# Altium PCB temperature_logger_pcb.PcbDoc
Units mm, origin at the board's own origin, x right, y up, seen from the top; angles counter-clockwise.
Board outline 31 x 41 mm, 2 copper layers (Top Layer, Bottom Layer); 41 components, 32 nets, 188 pads, 45 vias.
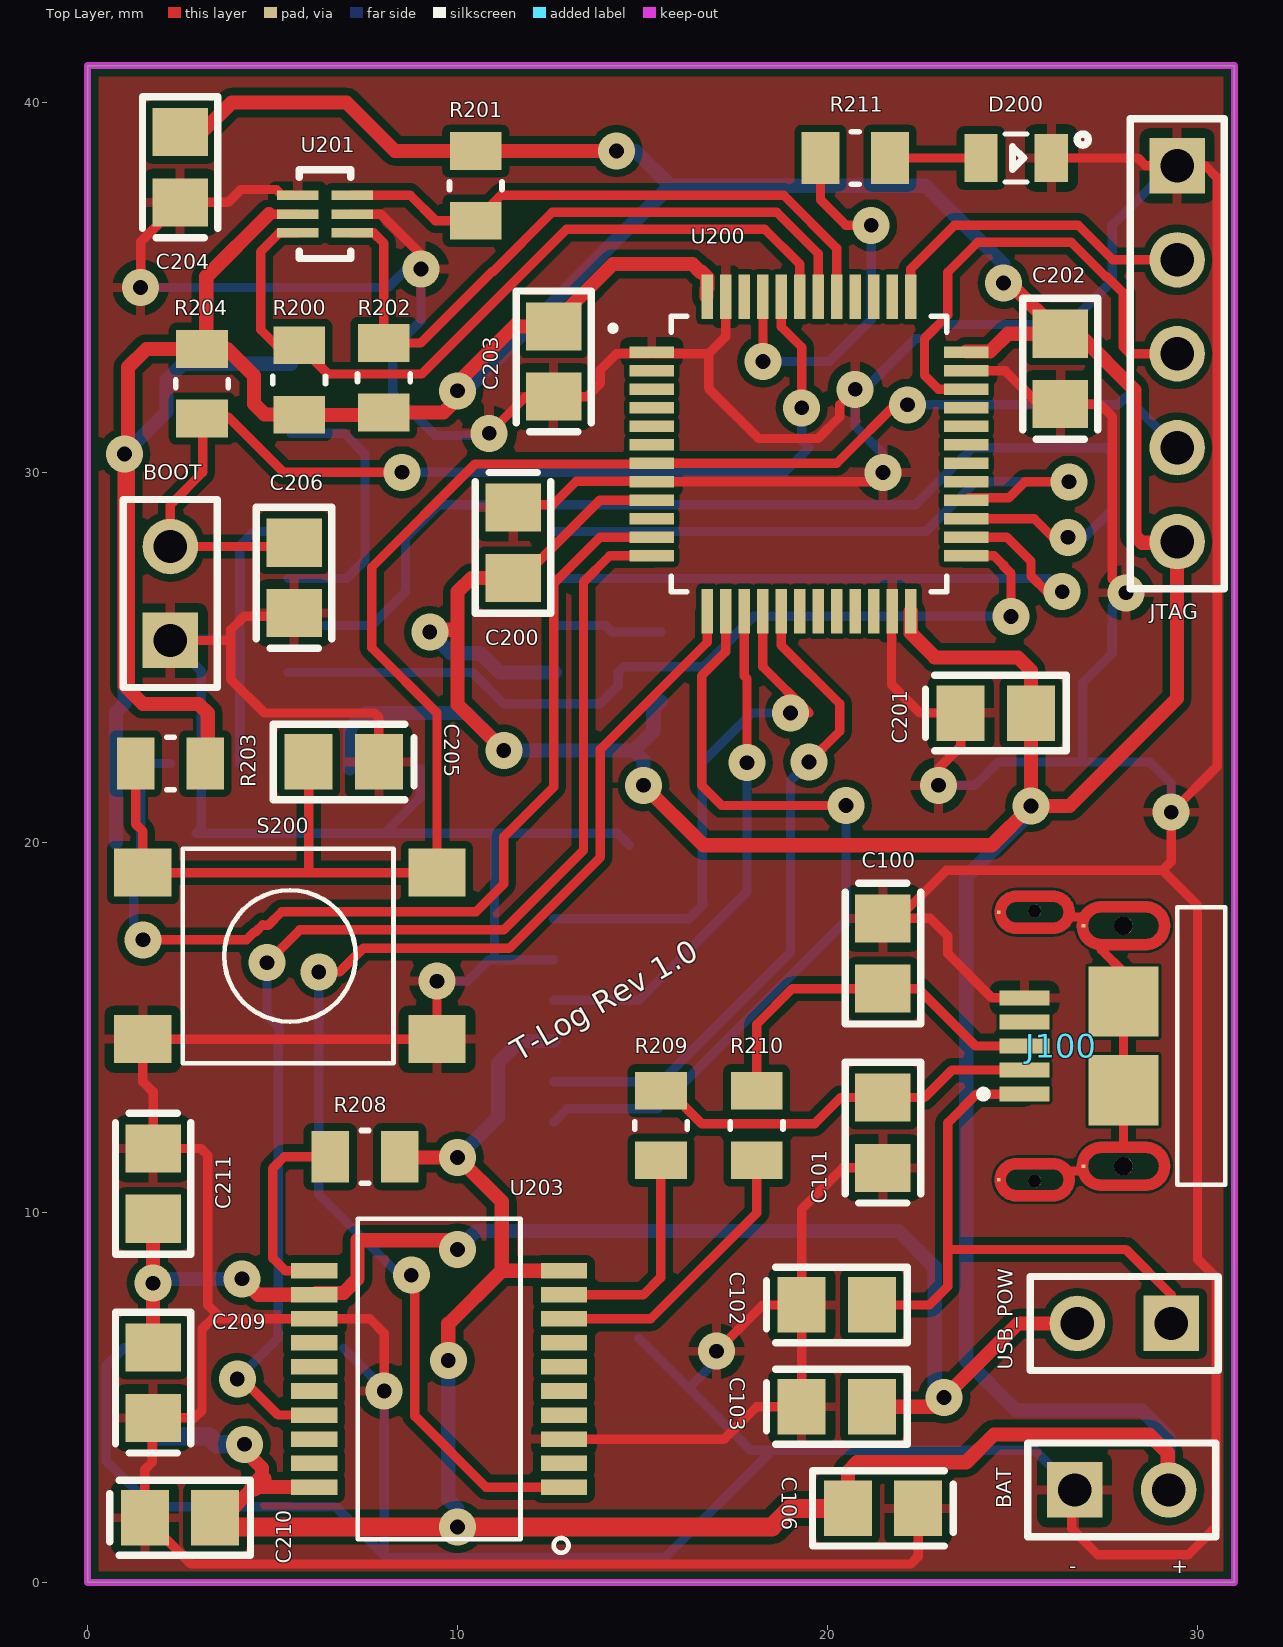
[diagram p0: Top Layer view]
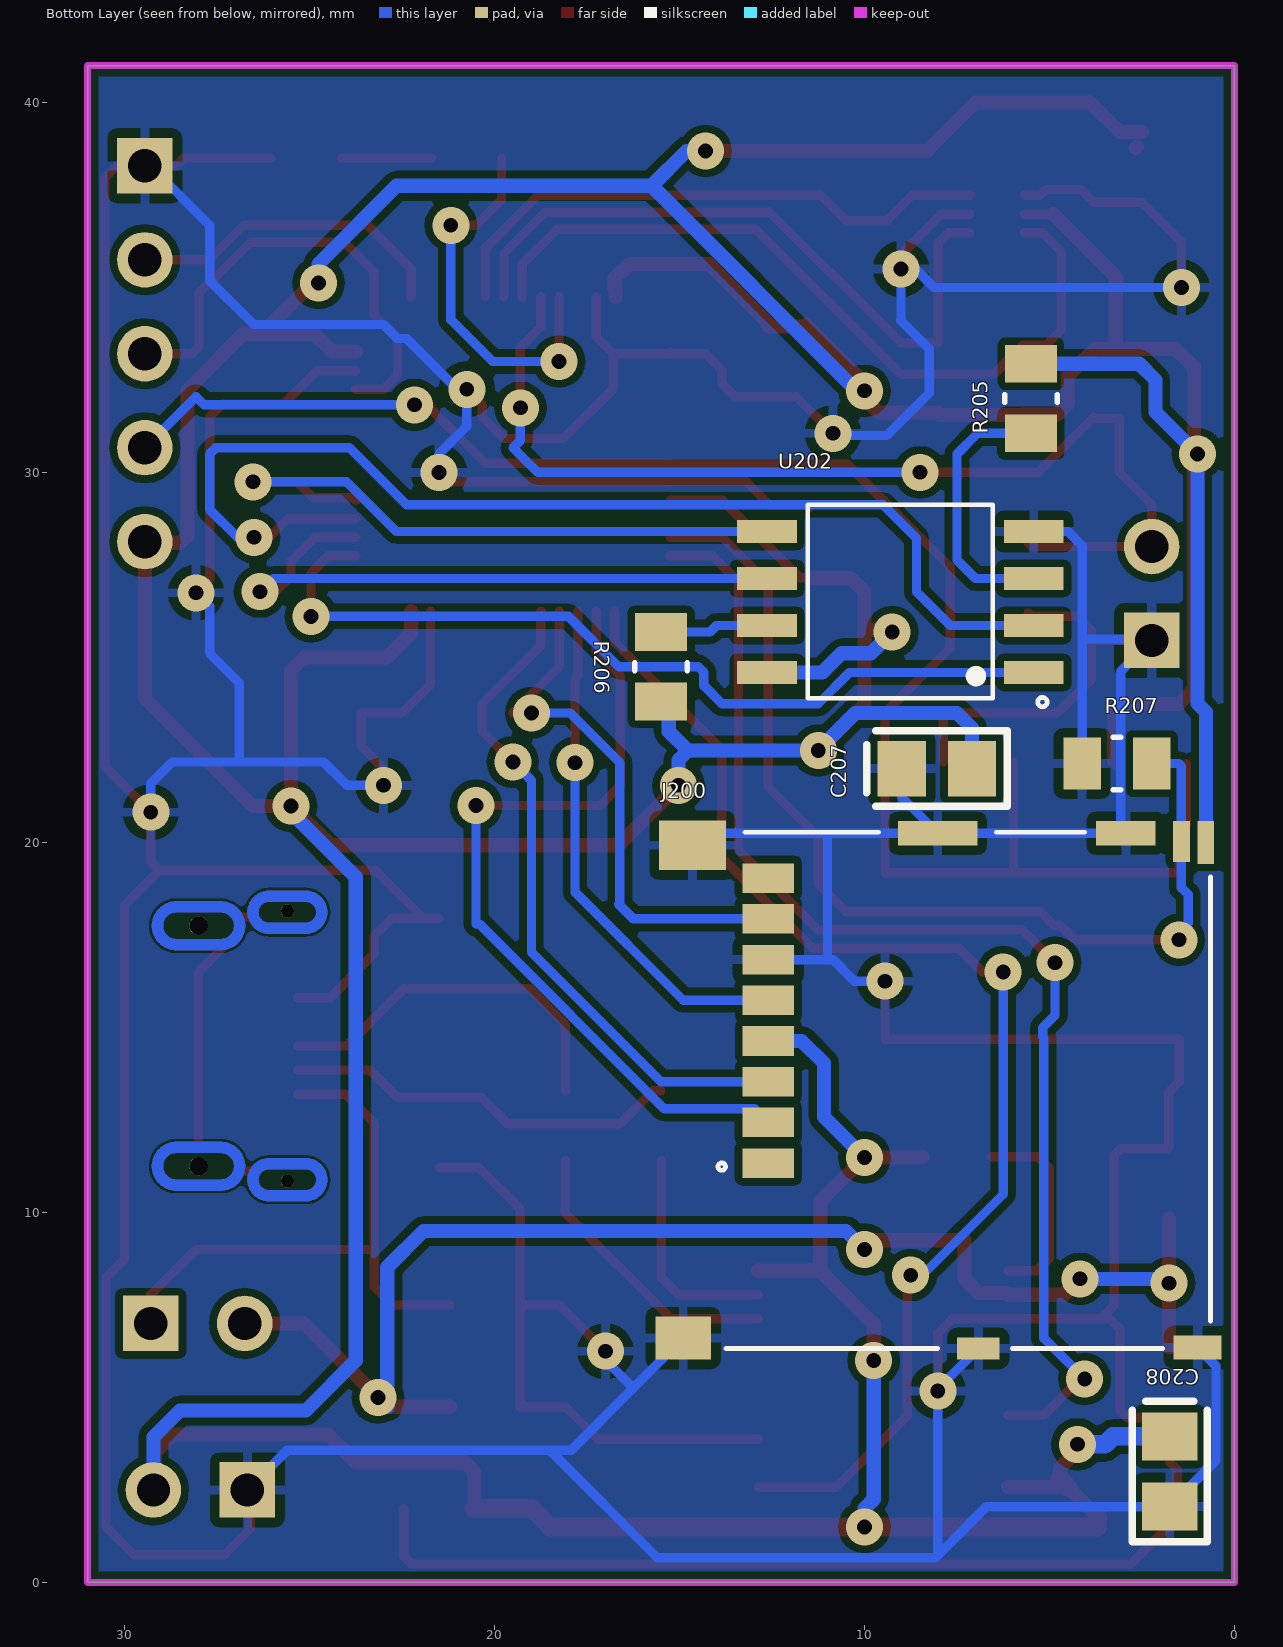
[diagram p1: Bottom Layer view, seen from below]

## Layer stack, top to bottom
Top Solder: solder mask 0.0102, Solder Resist, Dk 3.5
Top Layer: signal copper 0.0356
Dielectric 1: dielectric 0.32, FR-4, Dk 4.8
Bottom Layer: signal copper 0.0356
Bottom Solder: solder mask 0.0102, Solder Resist, Dk 3.5

## Board outline
0,0 0,41 31,41 31,0

## Design rules (kind name [scope] priority, off if disabled: settings)
Clearance STM32F4 [InComponent('U200')] p1: gap=0.152 ignorepadtopadclearanceinfootprint=FALSE
Clearance USB_PORT [InComponent('J100')] p2: gap=0.07 ignorepadtopadclearanceinfootprint=FALSE
Clearance [All] p3: gap=0.203 ignorepadtopadclearanceinfootprint=FALSE
ComponentClearance [All] p1: gap=0.254 collisioncheckmode=3 verticalgap=0.254 showdistances=TRUE
MinimumSolderMaskSliver [All] p1: minsoldermaskwidth=0.152
MinimumSolderMaskSliver MinimumSolderMaskSliver_STM [HasFootprint('LQFP48-7x7mm')] p2: minsoldermaskwidth=0.03
MinimumSolderMaskSliver MinimumSolderMaskSliver_MicroSD [HasFootprint('MicroSD')] p3: minsoldermaskwidth=0
PolygonConnect [All] p1: connectstyle=Relief reliefconductorwidth=0.254 reliefentries=4 polygonreliefangle="90 Angle" airgapwidth=0.254
RoutingVias [All] p1: holewidth=0.4 width=1 viastyle="Through Hole" minholewidth=0.3 minwidth=1 maxholewidth=0.711 maxwidth=1
SilkToSolderMaskClearance [IsPad] p1: minsilkscreentomaskgap=0.1 clearancetoexposedcopper=TRUE
SolderMaskExpansion SolderMaskExpansion_FTDI [HasFootprint('SSOP20')] p1: expansion=0
SolderMaskExpansion SolderMaskExpansion_TMP [HasFootprint('SOT563')] p2: expansion=0
SolderMaskExpansion SolderMaskExpansion_USB [HasFootprint('MicroUSB')] p3: expansion=0
SolderMaskExpansion SolderMaskExpansion_MicroSD [HasFootprint('MicroSD')] p4: expansion=0.01
SolderMaskExpansion [All] p5: expansion=0.1
Width "Schematic Width Constraint_1" [InNet('5V')] p1: maxlimit=0.508 minlimit=0.381 preferedwidth=0.381 minimp=50.000000 maximp=50.000000 favimp=50.000000
Width "Schematic Width Constraint" [InNet('3V')] p2: maxlimit=0.508 minlimit=0.254 preferedwidth=0.381 bottomlayer_minwidth=0.381 minimp=50.000000 maximp=50.000000 favimp=50.000000
Width [All] p3: maxlimit=0.381 minlimit=0.152 preferedwidth=0.254
27 further rules are at their usual default settings.

## Classes and differential pairs
component class 01_Power: BAT C100 C101 C102 C103 C106 J100 USB_POW
component class 02_MCU: BOOT C200 C201 C202 C203 C204 C205 C206 C207 C208 C209 C210 C211 D200 J200 JTAG R200 R201 R202 R203 R204 R205 R206 R207 R208 R209 R210 R211 S200 U200 U201 U202 U203

## Components (designator, comment, footprint, x,y, rotation, side; value= is the part's Value field where it differs from the comment)
BAT "" HDR1X2 26.68,2.5 r0 top
BOOT "" HDR1X2 2.239,25.46 r90 top
C100 "47 pF" C0805 21.5,17 r270 top
C101 "47 pF" C0805 21.5,12.157 r90 top
C102 "10 nF" C0805 20.252,7.5 r0 top
C103 "100 nF" C0805 20.252,4.75 r0 top
C106 "10 nF" C0805 21.5,2 r180 top
C200 "1000 pF" C0805 11.5,28.102 r270 top
C201 "1000 pF" C0805 24.548,23.5 r0 top
C202 "1000 pF" C0805 26.294,32.8 r90 top
C203 "1000 pF" C0805 12.599,33 r90 top
C204 "1000 pF" C0805 2.5,38.25 r90 top
C205 "1000 pF" C0805 6.924,22.176 r180 top
C206 "1000 pF" C0805 5.581,27.152 r90 top
C207 "1000 pF" C0805 8.044,22 r180 bottom
C208 "1000 pF" C0805 1.75,3 r270 bottom
C209 "100 nF" C0805 2.5,1.75 r0 top
C210 "1000 pF" C0805 1.771,5.4 r90 top
C211 "47 pF" C0805 1.771,10.779 r270 top
D200 "LGR971" D0805 25.1,38.5 r0 top value="Green LED"
J100 "USB_Micro_B" MicroUSB 28,14.5 r90 top value="USB Micro B"
J200 "MicroSD" MicroSD 7.849,13.3 r270 bottom
JTAG "" HDR1X5 29.45,38.29 r270 top
R200 "5 k" R0805 5.719,32.5 r90 top value=5k
R201 "5 k" R0805 10.493,37.75 r270 top value=5k
R202 "5 k" R0805 8.008,32.561 r90 top value=5k
R203 "1 k" R0805 2.239,22.135 r180 top value=1k
R204 "1 k" R0805 3.094,32.4 r270 top value=1k
R205 "1 k" R0805 5.5,32 r270 bottom value=1k
R206 "1 k" R0805 15.5,24.75 r90 bottom value=1k
R207 "10 k" R0805 3.178,22.135 r0 bottom value=10k
R208 "1 k" R0805 7.5,11.505 r180 top value=1k
R209 "27" R0805 15.5,12.348 r90 top
R210 "27" R0805 18.086,12.348 r90 top
R211 "1 k" R0805 20.75,38.5 r180 top value=1k
S200 "Switch_tactile" Tactile1 5.472,16.935 r180 top value=Switch_Tactile
U200 "STM32L053" LQFP48-7x7mm 19.5,30.5 r0 top value=STM32L053C8T6
U201 "TMP112" SOT563 6.419,36.984 r180 top value=TMP112AIDRLT
U202 "16MB_FLASH" 8-SOIC 9.03,26.5 r0 bottom value=MX25R1635FM2IH1
U203 "FT231XS-R" SSOP20 9.5,5.5 r90 top value=FT231
USB_POW "" HDR1X2 29.291,7 r180 top

## Footprints (in the part's own frame and the unit in brackets; to place one, negate y for a bottom-side part, rotate by r counter-clockwise, add the part's x,y. Pads: shape width x height; smd on the part's side, far side on the other; paste and mask are expansions set on the pad)
8-SOIC [mm]
  rect 1.61x0.61 smd: 1(-3.605,1.905) 2(-3.605,0.635) 3(-3.605,-0.635) 4(-3.605,-1.905) 5(3.605,-1.905) 6(3.605,-0.635) 7(3.605,0.635) 8(3.605,1.905)
  silkscreen extent -3.97,-2.63 2.5,2.83
C0805 [mm] "Chip Capacitor; Body 2.0 x 1.2 mm (LxW typ)"
  rect 1.3x1.5 smd: 1(-0.95,0) 2(0.95,0)
  silkscreen extent -1.9,-1.02 1.91,1.02
D0805 [mm]
  rect 0.9x1.3 smd: A(-0.95,0) C(0.95,0)
  silkscreen extent -0.3,-0.65 1.95,0.65
HDR1X2 [mm] "Connector; Header; 2 Position"
  rect 1.5x1.5 hole 0.9: 1(0,0)
  round 1.5 hole 0.9: 2(2.54,0)
  silkscreen extent -1.27,-1.27 3.81,1.27
HDR1X5 [mm] "Connector; Header; 5 Position"
  rect 1.5x1.5 hole 0.9: 1(0,0)
  round 1.5 hole 0.9: 2(2.54,0) 3(5.08,0) 4(7.62,0) 5(10.16,0)
  silkscreen extent -1.27,-1.27 11.43,1.27
LQFP48-7x7mm [mm]
  rect 1.194x0.305 smd: 1(-4.25,2.75) 2(-4.25,2.25) 3(-4.25,1.75) 4(-4.25,1.25) 5(-4.25,0.75) 6(-4.25,0.25) 7(-4.25,-0.25) 8(-4.25,-0.75) 9(-4.25,-1.25) 10(-4.25,-1.75) 11(-4.25,-2.25) 12(-4.25,-2.75) 25(4.25,-2.75) 26(4.25,-2.25) 27(4.25,-1.75) 28(4.25,-1.25) 29(4.25,-0.75) 30(4.25,-0.25) 31(4.25,0.25) 32(4.25,0.75) 33(4.25,1.25) 34(4.25,1.75) 35(4.25,2.25) 36(4.25,2.75)
  rect 0.305x1.194 smd: 13(-2.75,-4.25) 14(-2.25,-4.25) 15(-1.75,-4.25) 16(-1.25,-4.25) 17(-0.75,-4.25) 18(-0.25,-4.25) 19(0.25,-4.25) 20(0.75,-4.25) 21(1.25,-4.25) 22(1.75,-4.25) 23(2.25,-4.25) 24(2.75,-4.25) 37(2.75,4.25) 38(2.25,4.25) 39(1.75,4.25) 40(1.25,4.25) 41(0.75,4.25) 42(0.25,4.25) 43(-0.25,4.25) 44(-0.75,4.25) 45(-1.25,4.25) 46(-1.75,4.25) 47(-2.25,4.25) 48(-2.75,4.25)
  silkscreen extent -5.38,-3.72 3.72,3.72
MicroSD [mm]
  rect 0.8x1.4 smd: 1(1.965,-4.75) 2(0.865,-4.75) 3(-0.235,-4.75) 4(-1.335,-4.75) 5(-2.435,-4.75) 6(-3.535,-4.75) 7(-4.635,-4.75) 8(-5.735,-4.75)
  rect 1.15x0.45 smd: 9(-6.7,7.075)
  rect 1.1x0.45 smd: 10(-6.725,6.415)
  rect 1.35x1.8 smd: 11(-6.625,-6.8)
  rect 0.65x2.14 smd: 12(-6.95,-0.17)
  rect 0.65x1.6 smd: 13(-6.95,4.91)
  rect 0.65x1.3 smd: 14(6.95,6.85)
  rect 0.6x1.15 smd: 15(6.975,0.925)
  rect 1.16x1.5 smd: 16(6.695,-7.05)
  silkscreen extent -6.98,-6.11 6.98,7.2
MicroUSB [mm]
  rect 0.4x1.35 smd: 1(-1.3,2.675) 2(-0.65,2.675) 3(0,2.675) 4(0.65,2.675) 5(1.3,2.675)
  round 0.35 hole 0.35 unplated paste+0 mask+0: None(-3.65,2.4) None(3.65,2.4)
  round 0.5 hole 0.5 unplated paste+0 mask+0: None(-3.25,0) None(3.25,0)
  rect 0.1x0.1 smd: S1(-3.25,1.08) S2(3.25,1.08) S3(-3.615,3.369) S6(3.615,3.369)
  rect 1.9x1.9 smd: S4(-1.2,0) S5(1.2,0)
  Top Layer region: 258 vertices and 0 holes, not listed, extent 3.035,1.32 4.195,3.48
  Top Layer region: 258 vertices and 0 holes, not listed, extent -4.195,1.32 -3.035,3.48
  Top Layer region: 258 vertices and 0 holes, not listed, extent 2.59,-1.26 3.91,1.26
  Top Layer region: 258 vertices and 0 holes, not listed, extent -3.91,-1.26 -2.59,1.26
  Bottom Layer region: 258 vertices and 0 holes, not listed, extent 3.035,1.32 4.195,3.48
  Bottom Layer region: 258 vertices and 0 holes, not listed, extent -4.195,1.32 -3.035,3.48
  Bottom Layer region: 258 vertices and 0 holes, not listed, extent 2.59,-1.26 3.91,1.26
  Bottom Layer region: 258 vertices and 0 holes, not listed, extent -3.91,-1.26 -2.59,1.26
  silkscreen extent -3.75,-2.75 3.75,3.89
R0805 [mil]
  rect 40x55 smd: 1(-37,0) 2(37,0)
  silkscreen extent -4,-28 4,28
SOT563 [mil]
  rect 44x10 smd: 1(-29,20) 2(-29,0) 3(-29,-20) 4(29,-20) 5(29,0) 6(29,20)
  silkscreen extent -28,-47 28,47
SSOP20 [mm]
  rect 0.42x1.25 smd: P$1(-2.925,-3.375) P$2(-2.275,-3.375) P$3(-1.625,-3.375) P$4(-0.975,-3.375) P$5(-0.325,-3.375) P$6(0.325,-3.375) P$7(0.975,-3.375) P$8(1.625,-3.375) P$9(2.275,-3.375) P$10(2.925,-3.375) P$11(2.925,3.375) P$12(2.275,3.375) P$13(1.625,3.375) P$14(0.975,3.375) P$15(0.325,3.375) P$16(-0.325,3.375) P$17(-0.975,3.375) P$18(-1.625,3.375) P$19(-2.275,3.375) P$20(-2.925,3.375)
  silkscreen extent -4.7,-3.5 4.33,2.2
Tactile1 [mm] "6 mm x 6 mm"
  rect 1.55x1.3 smd: 1(-3.975,2.25) 2(3.975,2.25) 3(-3.975,-2.25) 4(3.975,-2.25)
  silkscreen extent -2.8,-2.9 2.9,2.9

## Part data
BAT BOOT USB_POW: library part "Header 2", "Header, 2-Pin", LatestRevisionDate=17-Jul-2002, LatestRevisionNote="Re-released for DXP Platform.", Publisher="Altium Limited"
C100 C101 C211: library part Cap-47pF, "CAP CER 47PF 1KV C0G/NP0 0805", Manufacturer=KEMET, Manufacturer Part Number=C0805C470JDGACTU, Package=C0805, Digikey_link=https://www.digikey.com.au/product-detail/en/kemet/C0805C470JDGACTU/399-7157-1-ND/3439404, Price="0.62 AUD"
C102 C106: library part Cap-10nF, "CAP CER 10000PF 10V X7R 0805", Manufacturer="Wurth Electronics Inc.", Manufacturer Part Number=885012207011, Package=C0805, Digikey_link=https://www.digikey.com.au/product-detail/en/wurth-electronics-inc/885012207011/732-8021-1-ND/5454648, Price="0.15 AUD"
C103 C209: library part Cap-100nF, "CAP CER 0.1UF 50V X7R 0805", Manufacturer=KEMET, Manufacturer Part Number=C0805X104K5RACTU, Package=C0805, Digikey_link=https://www.digikey.com.au/product-detail/en/kemet/C0805X104K5RACTU/399-5330-1-ND/1842309, Price="0.46 AUD"
C200 C201 C202 C203 C204 C205 C206 C207 C208 C210: library part Cap-1000pF, "CAP CER 1000PF 100V X7R 0805", Manufacturer=KEMET, Manufacturer Part Number=C0805C102K1RACTU, Package=C0805, Digikey_link=https://www.digikey.com.au/product-detail/en/kemet/C0805C102K1RACTU/399-1148-2-ND/411147, Price="0.035 USD"
D200: "LED GREEN DIFFUSED 0805 SMD", Manufacturer="Osram Opto", Manufacturer Part Number="LG R971-KN-1", Package=LED0805, Digikey_link=https://www.digikey.com.au/product-detail/en/osram-opto-semiconductors-inc/LG-R971-KN-1/475-1410-2-ND/1227925, Price="0.09 USD"
J100: "USB - micro B USB 2.0 Receptacle Connector 5 Position Surface Mount, Right Angle; Through Hole", Manufacturer="TE Connectivity", Manufacturer Part Number=2040002-1, Package=USB-Micro-B, Digikey_link=https://www.digikey.com.au/product-detail/en/te-connectivity-amp-connectors/2040002-1/A108263CT-ND/4021990, Price="3.03 USD", Product_Type=Connector
J200: "MICRO SD PUSH PUSH LOW PROFILE TYPE", Manufacturer="TE Connectivity", Manufacturer Part Number=2201778-1, Digikey_link=https://www.digikey.com.au/product-detail/en/te-connectivity-amp-connectors/2201778-1/A118117CT-ND/4729820, Package=MicroSD, Price="3.61 USD", Product_Type="Removable Memory Products"
JTAG: library part "Header 5", "Header, 5-Pin", LatestRevisionDate=17-Jul-2002, LatestRevisionNote="Re-released for DXP Platform.", Publisher="Altium Limited"
R200 R201 R202: library part Res-5k, "RES SMD 4.7K OHM 0.1% 1/8W 0805", Manufacturer="Panasonic Electronic Components", Manufacturer Part Number=ERA-6AEB472V, Package=R0805, Digikey_link=https://www.digikey.com.au/product-detail/en/panasonic-electronic-components/ERA-6AEB472V/P4.7KDACT-ND/1465963, Price="0.51 AUD"
R203 R204 R205 R206 R208 R211: library part Res-1k, "RES 1K OHM 0.1% 1/5W 0805", Manufacturer="Vishay Dale", Manufacturer Part Number=TNPW08051K00BEEA, Package=R0805, Digikey_link=https://www.digikey.com.au/product-detail/en/vishay-dale/TNPW08051K00BEEA/TNP1.00KABTR-ND/1607282, Price="0.03 USD"
R207: library part Res-10k, "RES SMD 10K OHM 0.1% 1/8W 0805", Manufacturer="Panasonic Electronic Components", Manufacturer Part Number=ERA-6AEB103V, Package=R0805, Digikey_link=https://www.digikey.com/product-detail/en/panasonic-electronic-components/ERA-6AEB103V/P10KDACT-ND/1465971, Price="0.36 AUD"
R209 R210: library part Res-27, "RES SMD 27 OHM 5% 1/8W 0805", Manufacturer="Panasonic Electronic Components", Manufacturer Part Number=ERJ-6GEYJ270V, Package=R0805, Digikey_link=https://www.digikey.com.au/product-detail/en/panasonic-electronic-components/ERJ-6GEYJ270V/P27ACT-ND/42810, Price="0.11 AUD"
S200: "SWITCH TACTILE SPST-NO 0.05A 12V", Manufacturer="C&K Components", Manufacturer Part Number=PTS645SM43SMTR, Package=6x6, Digikey_link=https://www.digikey.com.au/product-detail/en/c-k/PTS645SM43SMTR92-LFS/CKN9112CT-ND/1146934, Price="0.22 USD"
U200: library part STM32L0x3CL4, "IC MCU 32BIT 64KB FLASH 48LQFP", Manufacturer=STMicroelectronics, Manufacturer Part Number=STM32L053C8T6, Package=48LQFP, Digikey_link=https://www.digikey.com.au/product-detail/en/stmicroelectronics/STM32L053C8T6/497-14906-ND/4935255, Price="5.66 AUD"
U201: library part TMP112AIDRLT, "1.4V-Capable ?0.5?C Temperature Sensor with Alert Function and I2C/SMBus interface in SOT-563 6-SOT -40 to 125", Manufacturer="Texas Instruments", Package=SOT-563, Digikey_link=https://www.digikey.com/product-detail/en/texas-instruments/TMP112AIDRLR/296-38578-2-ND/2232593, Manufacturer Part Number=TMP112AIDRLT, Price="1 USD"
U202: library part MX25R1635, "IC FLASH 16M SPI 80MHZ 8SOP", Manufacturer=Macronix, Manufacturer Part Number=MX25R1635FM2IL0, Package=SOP-8, Digikey_link=https://www.digikey.com/product-detail/en/macronix/MX25R1635FM2IH1/1092-1176-ND/5957737, Price="0.97 USD"
U203: "USB Full Speed to Full Handshake UART with USB Charger Detection", Manufacturer=FTDI, Package="SSOP-20 FTDI", Digikey_link=Good, Manufacturer Part Number=FT231XS-R, Price="1.80 USD"

## Via types
v1: diameter 1, hole 0.4, Top Layer to Bottom Layer, 45 vias

## Nets (pads, with @x,y where several pads share a name; then routed paths per layer and width w, separated by ;. In a path a pad name is that pad's centre, name@x,y a point inside that pad or via, vN(x,y) a via of type N, cw(c..) or ccw(c..) an arc to the next point about the centre after c; other vN are vias at no path point)
3V: BAT.2 C106.2 C200.2 C201.2 C202.2 C203.2 C204.2 C207.2 C208.1 C209.2 J200.4 J200.9 JTAG.5 R200.1 R201.1 R202.1 R203.1 R204.1 R205.1 R206.1 R208.1 U200.9 U200.24 U200.36 U200.48 U201.5 U202.8 U203.P$10 U203.P$20 | length 240.8
  Top Layer w0.254: 4.901,36.984 U201.5 ; C200.2 11.747,27.152 13.84,29.245 15.245,29.245 U200.9
  Top Layer w0.381: v1(0.999,30.5) 0.999,24.245 1.095,24.149 ; C204.2 3.098,39.2 3.898,40 7,40 8.31,38.69 R201.1 v1(14.296,38.69) ; C204.2@2.643,38.8 C204.2@2.67,38.772 ; R203.1 3.25,22.207 3.25,23.5 3.002,23.748 1.497,23.748 1.095,24.149 ; C209.2@3.7,1.775 4.5,2.575 U203.P$20 ; v1@4.241,3.569 4.713,3.098 4.713,2.787 ; 4.901,36.984 3.209,35.293 3.209,33.456 R204.1 ; R208.1 8.458,11.487 v1(10,11.487) 11.195,10.292 11.195,8.425 ; v1(9.25,25.69) 9.31,25.75 10,25.75 ; v1(9.75,6) 9.75,7 9.77,7 11.195,8.425 ; v1(11.25,22.484) 10,23.734 10,25.75 ; C200.2 10.373,27.152 10,26.779 10,25.75 ; U203.P$10 11.195,8.425 ; v1(15.025,21.545) 16.645,19.925 24.439,19.925 v1(25.498,20.984) ; U200.48@16.729,34.75 16.729,34.966 16.75,34.986 16.75,35.275 16.597,35.427 16.552,35.427 16.347,35.632 14.202,35.632 12.599,34.029 C203.2 11.633,33.95 11.583,34 10,32.417 v1(10,32.209) 10,32 9.621,31.621 R202.1 7.947,31.56 R200.1 5.711,31.568 4.789,31.568 4.507,31.85 4.5,31.85 4.5,32.616 3.776,33.34 R204.1 ; C106.2 20.55,3 20.8,3.25 23.75,3.25 24.5,4 28.696,4 29.196,3.5 29.196,2.524 BAT.2 ; U200.24 22.25,25.66 22.9,25.01 22.9,25 25.15,25 25.498,24.652 C201.2 v1(25.498,20.984) ; U200.36@23.75,33.271 24.395,33.271 24.874,33.75 C202.2 ; v1(24.759,35.124) 24.92,35.124 C202.2 ; 1.095,24.149 1.095,32.845 1.59,33.34 R204.1 ; v1(25.498,20.984) 26.541,20.984 29.45,23.893 JTAG.5 29.422,28.102 28.5,28.102 28.5,28.091 28.3,28.291 28.3,32.232 26.782,33.75 C202.2
  Top Layer w0.508: C209.2@3.7,1.775 3.7,1.5 v1(10,1.5) 18.5,1.5 19,2 C106.2 ; v1@4.241,3.569 v1(4.241,3.734) ; 4.5,2.575 4.713,2.787
  Bottom Layer w0.381: J200.9 0.774,23.53 0.999,23.755 v1(0.999,30.5) 2.137,31.638 2.137,32.502 2.575,32.94 R205.1 ; C207.2 7.094,23.094 7.5,23.5 10.25,23.5 11.25,22.5 v1(11.25,22.484) 14.774,22.484 ; v1(9.25,25.69) 9.824,25.116 10.621,25.116 11.141,24.595 U202.8 ; v1(9.75,6) 9.75,2.25 10,2 v1(10,1.5) ; v1(10,11.487) 11.099,12.585 11.099,14.035 11.699,14.635 J200.4 ; v1(10,32.209) 10.209,32.209 15.75,37.75 ; v1(14.296,38.69) 14.81,38.69 15.75,37.75 ; v1(15.025,21.545) 15.025,22.233 14.774,22.484 ; R206.1 15.29,23.6 15.29,23 14.774,22.484 ; v1(24.759,35.124) 24.759,35.639 22.648,37.75 15.75,37.75 ; v1(25.498,20.984) 25.498,20.818 23.75,19.07 23.75,6 25.099,4.651 28.503,4.651 29.22,3.934 BAT.2
  Bottom Layer w0.508: C208.1 3.281,3.95 3.497,3.734 v1(4.241,3.734)
5V: C103.2 C210.2 C211.2 U203.P$12 USB_POW.2 | length 37.5
  Top Layer w0.381: C210.2 v1(1.771,8.09) C211.2 ; v1(4.178,8.206) 4.175,8.206 4.606,7.775 U203.P$12 6.171,7.821 6.913,7.821 7.3,8.208 7.3,9.25 9.75,9.25 v1(10,9) ; C103.2 22.9,4.75 v1(23.15,5) 25.15,7 USB_POW.2
  Bottom Layer w0.381: v1(1.771,8.09) 1.771,8 1.978,8.206 v1(4.178,8.206) ; v1(10,9) 10.5,9.5 21.919,9.5 22.9,8.519 22.9,4.75 v1(23.15,5)
ALERT: R201.2 U200.41 U201.3 | length 15.6
  Top Layer w0.254: U201.3 8.72,37.492 9.401,36.81 R201.2 11.175,37.492 18.817,37.492 20.25,36.059 U200.41
BOOT0: BOOT.2 C206.2 R204.2 U200.44 | length 28.9
  Top Layer w0.254: C206.2 5.479,28 BOOT.2 2.239,29.131 3.114,30.007 3.114,31.44 R204.2 3.765,31.46 3.805,31.5 5.298,30.007 v1(8.5,30.007) ; U200.44 18.75,33.94 19.302,33.388 v1(19.302,31.75)
  Bottom Layer w0.254: v1(8.5,30.007) 18.837,30.007 19.5,30.67 19.302,30.868 v1(19.302,31.75)
CARD_DETECT: J200.10 R207.1 U200.11 | length 27.9
  Top Layer w0.254: v1(1.5,17.371) 4.296,17.371 4.506,17.58 4.541,17.58 4.735,17.774 4.75,17.759 4.88,17.759 5.25,18.13 10.5,18.13 11.25,18.88 11.25,20.151 12.599,21.5 12.599,26.998 13.85,28.25 U200.11
  Bottom Layer w0.254: v1(1.5,17.371) 1.5,17.573 1.25,17.823 1.25,18.593 1.434,18.777 J200.10 1.434,22.062 1.507,22.135 R207.1
FLASH_CSN: U200.25 U202.1 | length 23.7
  Top Layer w0.254: U200.25 24.5,27.75 24.75,27.5 24.759,27.5 24.747,27.488 24.96,27.275 v1(24.96,26.11)
  Bottom Layer w0.254: U202.1 10.405,24.595 11.25,23.75 13.851,23.75 14.34,24.24 14.34,24.595 14.495,24.75 16.64,24.75 18,26.11 v1(24.96,26.11)
FLASH_MISO: U200.27 U202.2 | length 31.2
  Top Layer w0.254: U200.27 25.59,28.75 26.09,28.25 v1(26.5,28.25)
  Bottom Layer w0.254: U202.2 7.681,25.865 8.595,26.779 8.595,28.225 9.5,29.13 22.38,29.13 23.92,30.67 27.53,30.67 27.7,30.5 27.7,29 26.95,28.25 v1(26.5,28.25)
FLASH_MOSI: U200.28 U202.5 | length 17.4
  Top Layer w0.254: U200.28 23.818,29.318 24.904,29.318 25.335,29.75 v1(26.531,29.75)
  Bottom Layer w0.254: U202.5 22.655,28.405 24,29.75 v1(26.531,29.75)
FLASH_SCLK: U200.26 U202.6 | length 17.3
  Top Layer w0.254: U200.26 24.85,28.25 25.5,27.6 25.5,27.204 25.925,26.779 v1(26.342,26.779)
  Bottom Layer w0.254: U202.6 25.986,27.135 v1(26.342,26.779)
FT_RX: U200.13 U203.P$1 | length 34.8
  Top Layer w0.254: v1(6.25,16.504) 6.814,16.504 7.448,17.138 11.399,17.138 13.862,19.601 13.862,22.522 16.75,25.41 U200.13 ; v1(8.75,8.305) 8.849,8.206 8.849,4.496 10.77,2.575 U203.P$1
  Bottom Layer w0.254: v1(6.25,16.504) 6.25,10.495 8.44,8.305 v1(8.75,8.305)
FT_TX: U200.12 U203.P$17 | length 34
  Top Layer w0.254: v1@4.049,5.241 v1@4.178,5.37 ; v1@4.049,5.245 v1(4.049,5.5) 4.175,5.5 5.15,4.525 U203.P$17 ; v1(4.85,16.75) 5.737,17.637 11.252,17.637 13.405,19.79 13.405,27.04 14.115,27.75 U200.12
  Bottom Layer w0.254: v1(4.049,5.5) 5.15,6.601 5.15,14.716 5.184,14.75 5.184,14.997 4.85,15.331 v1(4.85,16.75)
GND: BAT.1 BOOT.1 C100.1 C101.1 C102.1 C103.1 C106.1 C200.1 C201.1 C202.1 C203.1 C204.1 C205.1 C206.1 C207.1 C208.2 C209.1 C210.1 C211.1 D200.C J100.5 J200.6 J200.11 J200.12 J200.13 J200.14 J200.15 J200.16 JTAG.1 R207.2 S200.1 S200.2 U200.1 U200.8 U200.23 U200.35 U200.47 U201.2 U201.4 U202.4 U203.P$3 U203.P$13 | length 315.4
  Top Layer w0.254: v1(1.434,35) 1.434,36.234 C204.1 3.8,37.3 4.148,37.648 5.098,37.648 5.255,37.492 U201.4 ; BOOT.1 3.832,25.46 3.872,25.5 ; C206.1 5.49,26.11 4.232,26.11 3.872,25.75 3.872,25.5 ; U201.2 7.922,36.984 9.012,35.894 v1(9.012,35.5) ; C205.1 7.874,23.376 7.75,23.5 4.781,23.5 3.872,24.409 3.872,25.5 ; v1(8.019,5.175) 8.019,6.731 7.625,7.125 U203.P$13 3.625,7.125 ; v1(9.447,16.25) S200.1 S200.2 1.497,13.535 1.771,13.26 C211.1 3.069,11.729 3.25,11.548 3.25,7.5 3.625,7.125 ; v1(10.855,31.06) 11.845,32.05 C203.1 13.5,32.05 13.862,32.412 13.862,32.776 14.296,33.21 15.21,33.21 U200.1 15.29,33.21 16.786,33.21 ; C200.1 11.578,29.13 12.575,29.13 13.211,29.766 15.234,29.766 U200.8 21.25,29.75 v1(21.5,30) ; U203.P$3 17.211,3.875 18.086,4.75 C103.1 C102.1 ; v1(17,6.25) 18.25,7.5 C102.1 ; U200.47 17.25,33.674 16.786,33.21 ; v1(20.75,32.25) 20.33,31.83 20.33,31.506 19.744,30.92 18.14,30.92 16.786,32.275 16.786,33.21 ; C101.1 20.417,11.207 19.302,10.091 C102.1 ; C100.1 C100.1@21.915,17.95 ; U200.23@21.729,26.25 21.729,24.268 22.498,23.5 C201.1 23.598,22.598 23,22 v1(23,21.545) ; C106.1 22.45,0.7 22.25,0.5 2.8,0.5 C209.1 1.55,3.05 1.75,3.25 1.75,4.429 C210.1 2.893,4.45 3.094,4.651 3.094,6.85 3.369,7.125 3.625,7.125 ; U200.35 24.8,32.75 25.7,31.85 C202.1 27.356,31.85 27.7,31.506 27.7,27.12 v1(28.07,26.75) ; J100.5 24.45,15.8 23.25,17 23.25,17.47 22.77,17.95 C100.1@21.915,17.95 ; D200.C 28.39,38.5 28.6,38.29 JTAG.1 30.21,38.29 30.53,37.97 30.53,22.058 v1(29.291,20.818) 29.291,19.486 29.054,19.25 ; BAT.1@26.605,2.575 26.605,1.449 27.304,0.75 29.75,0.75 30.5,1.5 30.5,8.24 30,8.74 30,18.304 29.054,19.25 ; C100.1@21.915,17.95 23.215,19.25 29.054,19.25
  Bottom Layer w0.254: J200.14 0.5,5.851 0.5,3.3 C208.2 6.7,2.05 8.019,0.731 ; v1(1.434,35) 8.118,35 8.774,35.656 8.93,35.5 v1(9.012,35.5) 9.012,34.114 9.018,34.108 8.25,33.34 8.25,32.151 9.401,31 10.795,31 v1(10.855,31.06) ; R207.2 4.118,25.5 ; U202.4 4.5,28.405 4.118,28.023 4.118,25.5 ; J200.15 8.019,5.23 v1(8.019,5.175) 8.019,0.731 ; C207.1 8.994,21.225 J200.12 ; v1(9.447,16.25) 10.27,16.25 10.855,16.835 11,16.835 ; J200.6 11,16.835 ; J200.11 14.324,20.25 11,20.25 ; J200.16 16.25,5.254 ; v1(17,6.25) 17,6.004 16.25,5.254 ; v1(20.75,32.25) 20.75,31.25 21.5,30.5 v1(21.5,30) ; v1@20.878,32.122 22.38,33.623 22.623,33.623 23,34 26.51,34 27.7,35.19 27.7,36.683 29.307,38.29 JTAG.1 ; v1(23,21.545) 23.991,21.545 24.622,22.176 26.898,22.176 ; BAT.1 25.611,3.569 18.5,3.569 ; v1(28.07,26.75) 27.7,26.38 27.7,25.116 26.898,24.314 26.898,22.176 ; v1(29.291,20.818) 29.291,21.595 28.71,22.176 26.898,22.176 ; 4.118,25.5 2.279,25.5 BOOT.1 3.077,24.622 3.077,20.388 J200.13 J200.12 ; 8.019,0.731 8.08,0.67 15.6,0.67 18.5,3.569 ; J200.12 11,20.25 ; 11,16.835 11,20.25 ; 16.25,5.254 17.934,3.569 18.5,3.569
I2C_SCL: R202.2 U200.42 U201.1 | length 18.5
  Top Layer w0.254: U201.1 7.733,36.476 8.008,36.2 R202.2 9.006,33.501 10.933,35.427 10.955,35.427 12.562,37.035 18.627,37.035 19.75,35.912 U200.42
I2C_SDA: R200.2 U200.43 U201.6 | length 21.3
  Top Layer w0.254: U201.6 5.184,36.476 4.68,35.972 4.68,33.858 5.098,33.44 R200.2 6.496,32.663 9.03,32.663 12.945,36.578 18.305,36.578 19.25,35.632 U200.43
MICROSD_CLK: J200.5 U200.15 | length 14.1
  Top Layer w0.254: U200.15 17.75,24.5 17.825,24.425 v1(17.825,22.156)
  Bottom Layer w0.254: J200.5 14.899,15.735 17.825,18.661 v1(17.825,22.156)
MICROSD_CS: J200.2 U200.14 | length 22.4
  Top Layer w0.254: U200.14 17.25,25.16 16.597,24.507 16.597,21.545 17.142,21 v1(20.498,21)
  Bottom Layer w0.254: J200.2 12.969,12.805 15.416,12.805 20.409,17.797 20.5,17.797 20.5,20.998 v1(20.498,21)
MICROSD_DI: J200.3 U200.17 | length 18.3
  Top Layer w0.254: U200.17 18.75,25.328 20.33,23.748 20.33,23.006 v1(19.5,22.176)
  Bottom Layer w0.254: J200.3 15.5,13.535 19,17.035 19,21.676 v1(19.5,22.176)
MICROSD_DO: J200.7 U200.16 | length 14.8
  Top Layer w0.254: U200.16 18.25,24.75 19.5,23.5 v1(19,23.5)
  Bottom Layer w0.254: J200.7 16.246,17.935 16.637,18.326 16.61,18.353 16.61,22.156 17.954,23.5 v1(19,23.5)
NetC102_2: C102.2 J100.1 USB_POW.1 | length 16.4
  Top Layer w0.254: C102.2 22.75,7.5 23.25,8 23.25,9 ; J100.1 24.029,13.2 23.25,12.421 23.25,9 ; USB_POW.1 29.291,7.775 28.066,9 23.25,9
NetD200_A: D200.A R211.1 | length 2.5
  Top Layer w0.254: R211.1 D200.A
NetR205_2: R205.2 U202.3 | length 7.4
  Bottom Layer w0.254: U202.3 7,27.135 7.5,27.635 7.5,30.5 6.94,31.06 R205.2
NetR206_2: R206.2 U202.7 | length 2.9
  Bottom Layer w0.254: U202.7 14,25.865 14.175,25.69 R206.2
NetR208_2: R208.2 U203.P$11 | length 5.4
  Top Layer w0.254: U203.P$11 5.348,8.425 5.009,8.764 5.009,11.198 5.315,11.505 R208.2
NetR209_1: R209.1 U203.P$9 | length 6
  Top Layer w0.254: U203.P$9 15.025,7.775 15.49,8.24 15.49,11.398 R209.1
NetR210_1: R210.1 U203.P$8 | length 7.8
  Top Layer w0.254: U203.P$8 15.225,7.125 18.086,9.986 R210.1
NRST: C205.2 JTAG.4 R203.2 S200.3 S200.4 U200.7 | length 47.4
  Top Layer w0.254: R203.2 1.299,20.5 1.497,20.302 S200.4 6,19.185 ; C205.2 5.974,19.211 6,19.185 ; v1(22.16,31.83) 22.16,31.84 22,32 20.25,30.25 U200.7 15.23,30.23 10.473,30.23 7.681,27.438 7.681,25.265 9.447,23.5 S200.3 6,19.185
  Bottom Layer w0.254: v1(22.16,31.83) 27.85,31.83 28.07,32.05 JTAG.4
SHIELD_GND: J100.S1 J100.S2 J100.S3 J100.S4 J100.S5 J100.S6 | length 6.6
  Top Layer w0.254: 26.465,11.121 26.791,11.121 J100.S1 ; 26.521,17.987 26.91,17.987 ; 27.4,17.25 27.4,17.104 28,16.504 J100.S5 J100.S4 28,11.76
SWCLK: JTAG.2 U200.37 | length 8.8
  Top Layer w0.254: U200.37 22.25,35.5 23.433,36.683 26.779,36.683 27.712,35.75 JTAG.2
SWDIO: JTAG.3 U200.34 | length 13
  Top Layer w0.254: U200.34 23,32.25 22.623,32.627 22.623,33.623 23.25,34.25 23.25,35.416 24.06,36.226 26.59,36.226 27.523,35.293 27.552,35.293 27.988,34.857 27.988,33.402 28.18,33.21 JTAG.3
USB_DM: C101.2 J100.2 R209.2 | length 10.8
  Top Layer w0.254: R209.2 15.712,13.288 16.597,12.403 19.653,12.403 20.357,13.107 C101.2 22.623,13.107 23.366,13.85 J100.2
USB_DP: C100.2 J100.3 R210.2 | length 10.1
  Top Layer w0.254: R210.2 18.086,15.086 19.05,16.05 C100.2 22.45,16.05 24,14.5 J100.3
USER_LED: R211.2 U200.45 | length 10.7
  Top Layer w0.254: U200.45 18.257,34.743 v1(18.257,33) ; R211.2 19.81,37.371 20.498,36.683 v1(21.182,36.683) v1@21.055,36.81
  Bottom Layer w0.254: v1(18.257,33) 20.049,33 21.182,34.133 v1(21.182,36.683)
pads on no net: J100.4 J100.None J200.1 J200.8 U200.2 U200.3 U200.4 U200.5 U200.6 U200.10 U200.18 U200.19 U200.20 U200.21 U200.22 U200.29 U200.30 U200.31 U200.32 U200.33 U200.38 U200.39 U200.40 U200.46 U203.P$2 U203.P$4 U203.P$5 U203.P$6 U203.P$7 U203.P$14 U203.P$15 U203.P$16 U203.P$18 U203.P$19

## Polygon pours and split planes (outlines as drawn)
GND on Bottom Layer "Top Overlay-No Net" (solid, pour order 2): 0,41 31,41 31,0 0,0
GND on Top Layer "Top Overlay-No Net" (solid, pour order 0): 0,41 31,41 31,0 0,0

## Keep-outs
Keep-Out Layer:
  the board outline again, w0.2

## Silkscreen, mask and mechanical layers (free items; w line width, h text height)
Top Overlay:
  text "T-Log Rev 1.0" at 11.659,14.062 h0.6 r30
  text "-" at 26.531,0.25 h0.4
  text "+" at 29.291,0.25 h0.4